# EAGLE board PCB panel M1 (EAGLE 6.1), part 1 of 5
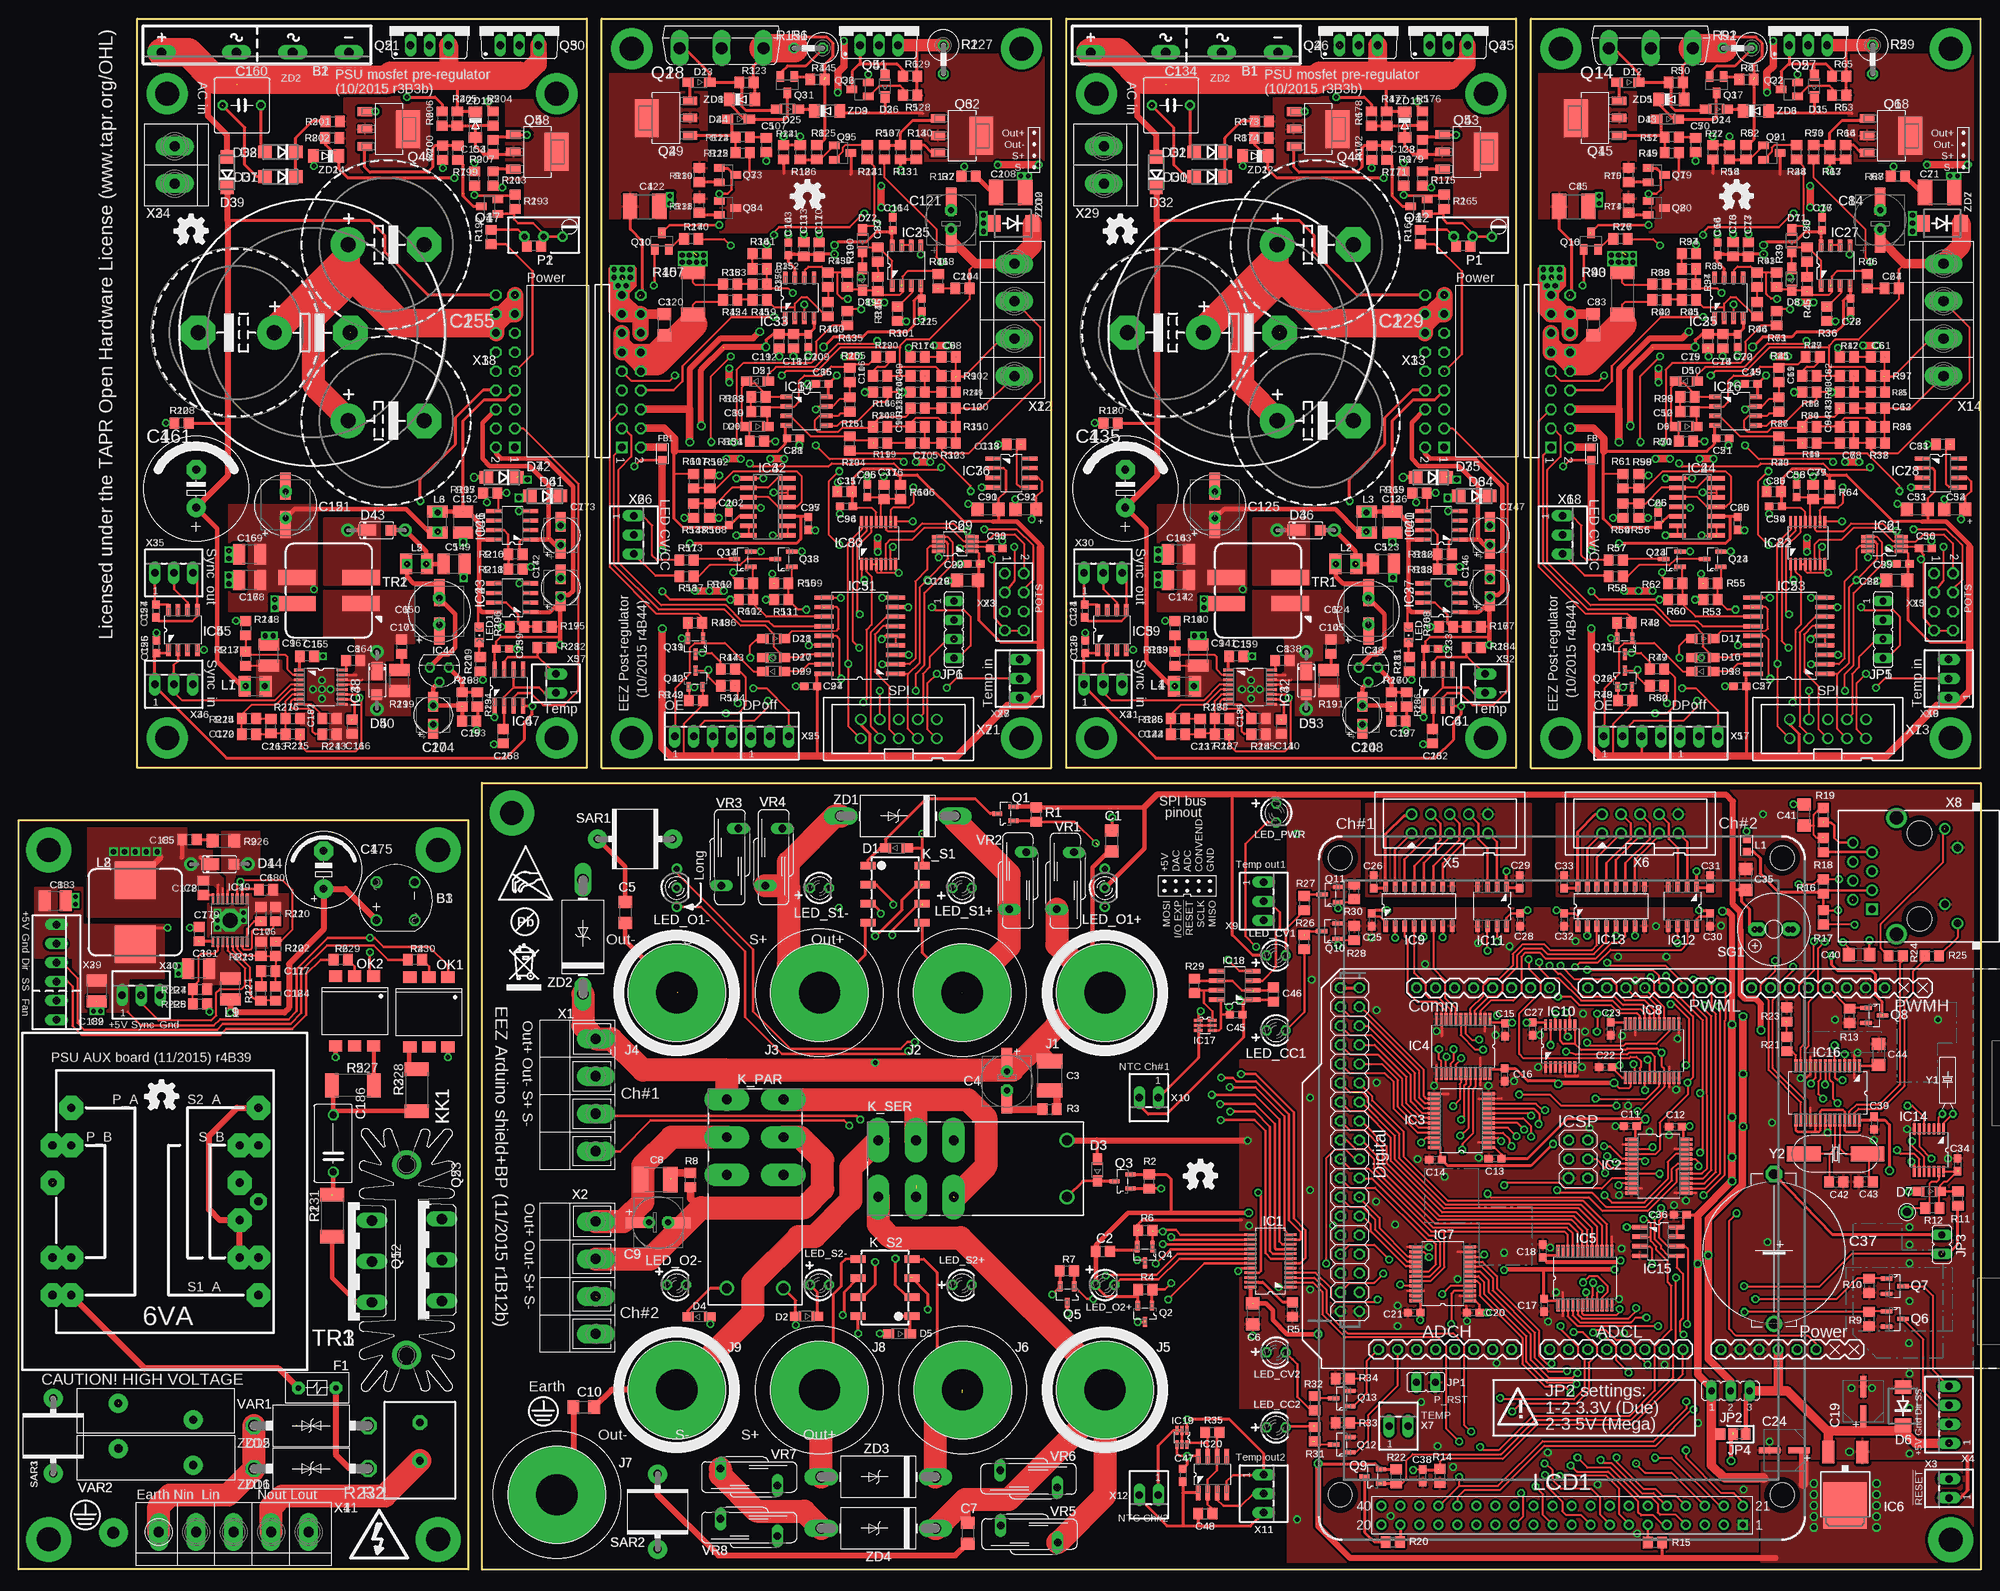
[diagram p0: board, top side]
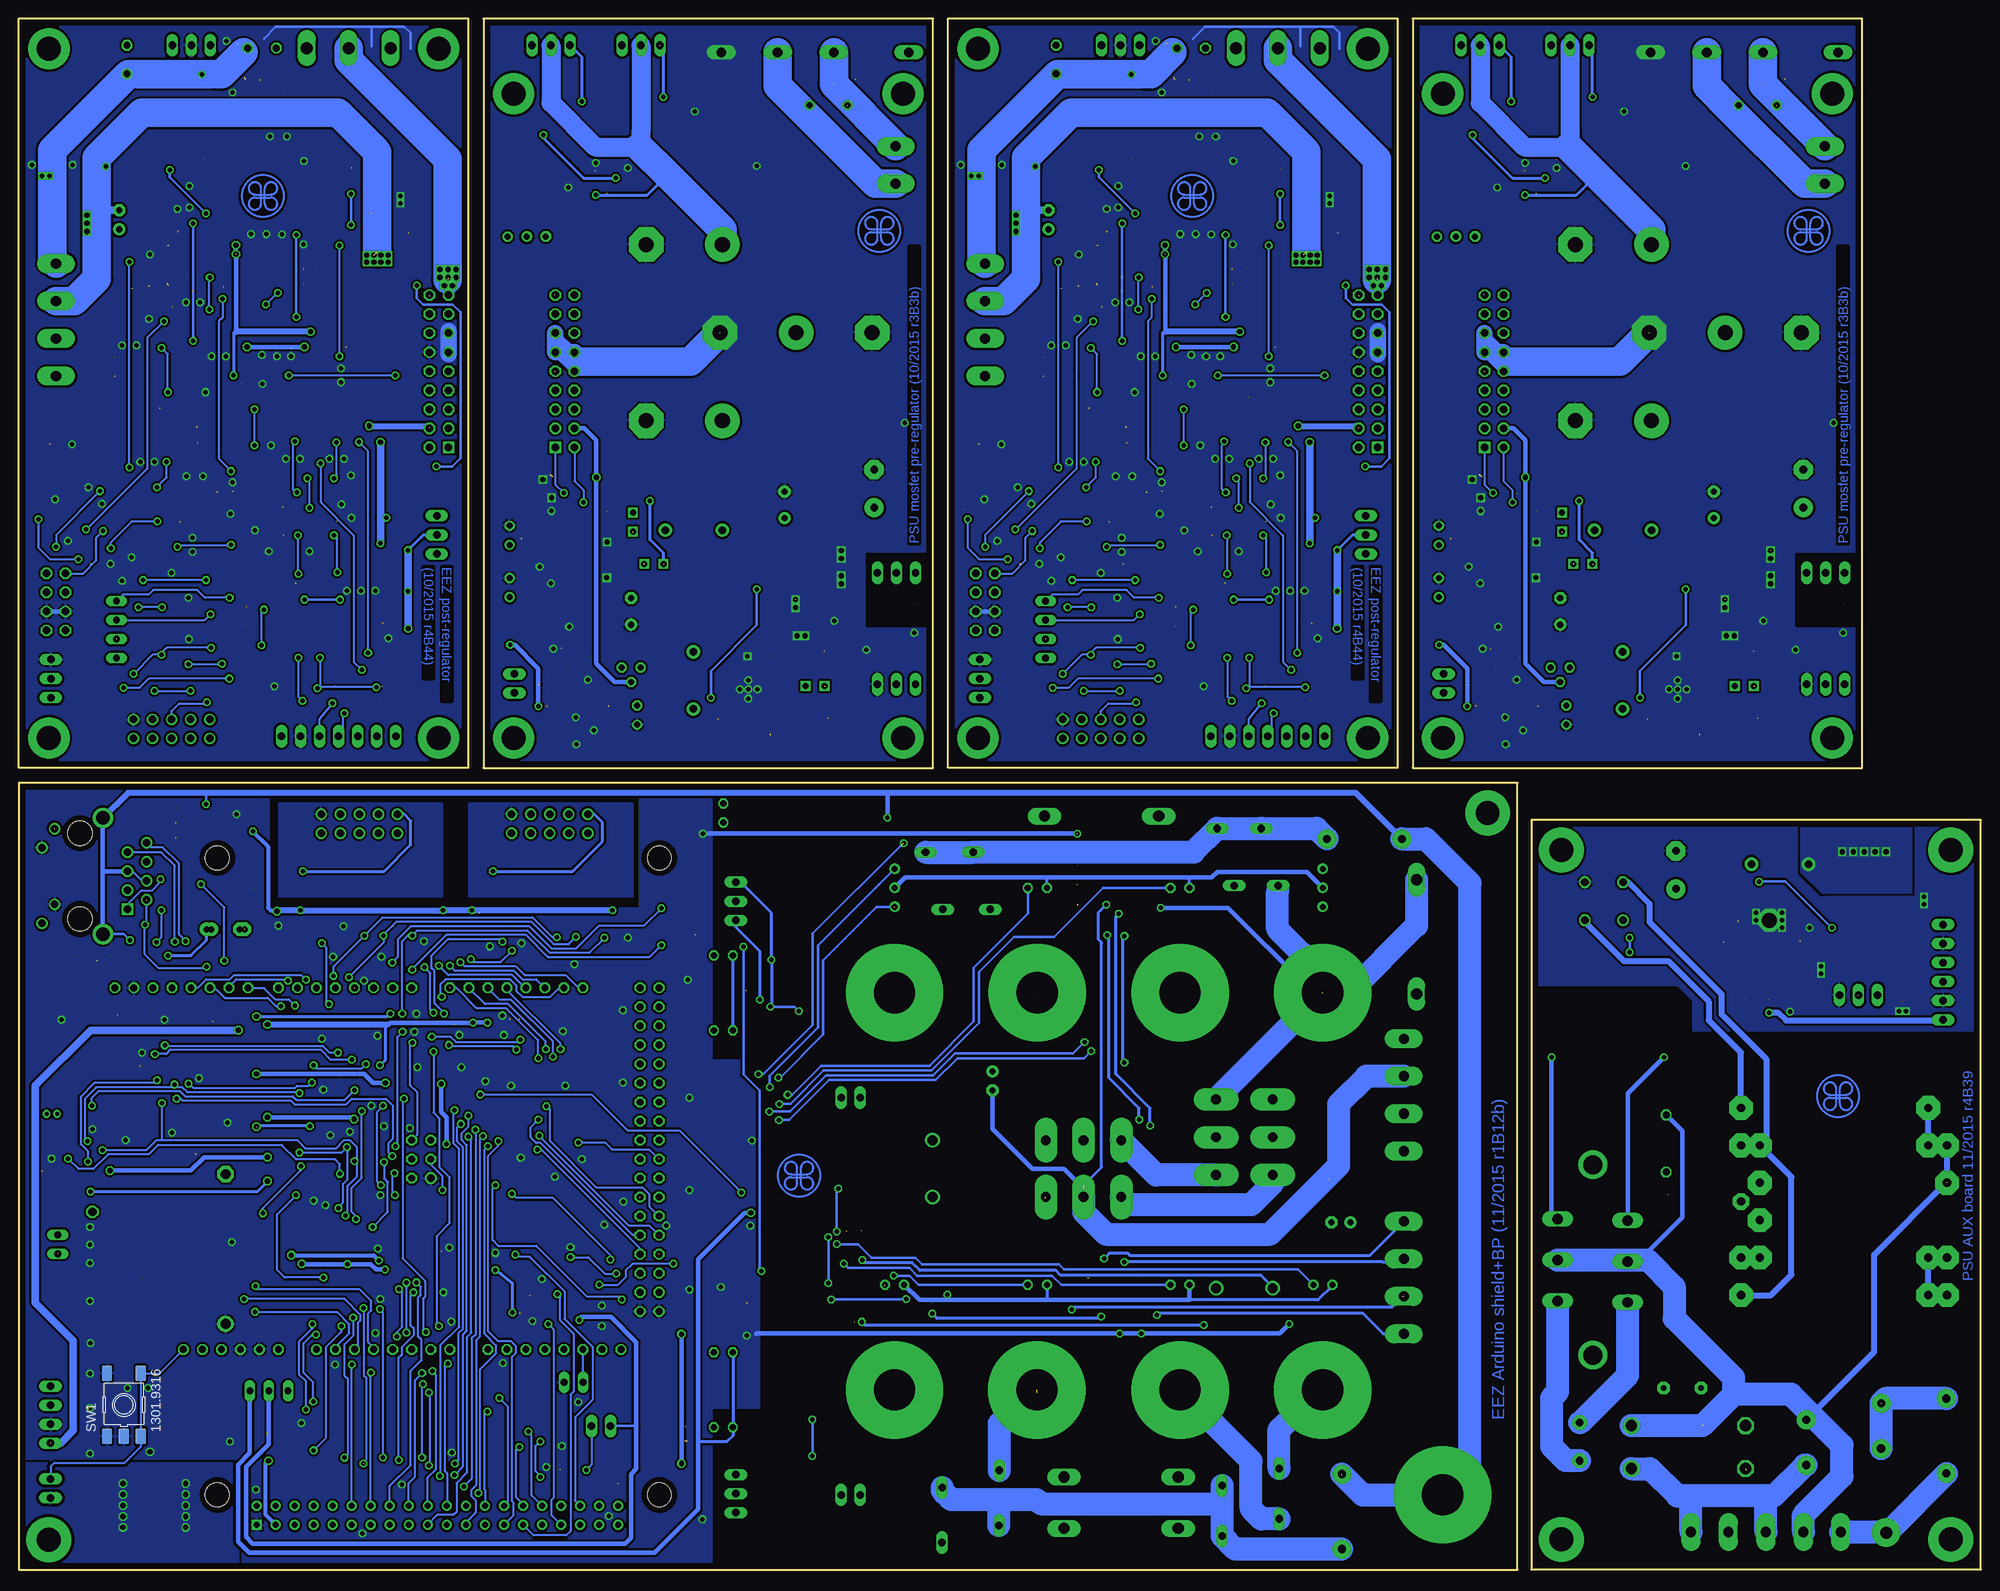
[diagram p1: board, bottom side, seen from below]

Size 261.84 x 207 mm. Coordinates in mm from the lower left corner, seen from the top.
Outline: 61.81,0 61.81,105 261.81,105 261.81,0 61.81,0
Outline: 261.81,107 261.81,207 201.81,207 201.81,107 261.81,107
Outline: 137.81,107 137.81,207 77.81,207 77.81,107 137.81,107
Outline: 139.81,207 199.81,207 199.81,107 139.81,107 139.81,207
Outline: 15.81,207 75.81,207 75.81,107 15.81,107 15.81,207
Outline: 0,0.03 0,100.03 60,100.03 60,0.03 0,0.03
Copper layers (1+5*16): Top 0.035mm / dielectric 0.75mm / Route5 0.035mm / dielectric 0.75mm / Bottom 0.035mm
Design rules: minimum track width 10mil, minimum drill 0.5mm, track to track 8mil, track to pad 8mil, pad to pad 8mil, via to via 8mil, smd to smd 8mil, copper to edge 30mil, drill to drill 8mil, minimum pad ring 10mil, minimum via ring 8mil, stop-mask expansion 0mil, vias tented up to drill 25mil, thermal gap 10mil
Net classes: 0 default: width 0.254 mm, drill 0.61 mm, clearance 0.254 mm; 1 power: width 0.254 mm, drill 0.406 mm, clearance 0.203 mm; 2 gnd: width 0.254 mm, drill 0.406 mm, clearance 0.203 mm; 3 isolators: width 0.254 mm, drill 0.61 mm, clearance 0.254 mm
tKeepout: 8 lines

## Footprints (pad centres in the part's own frame; a part is rotated, then mirrored left to right if it is on the bottom)
GBI20 = drill 1.3 long: + -12.75,-3.5; - 12.25,-3.5; AC1 -2.75,-3.5; AC2 4.75,-3.5
RB1A = drill 1.016: + -2.54,2.54 | drill 1.016 octagon: - 2.54,-2.54; AC1 2.54,2.54; AC2 -2.54,-2.54
C1206 = smd 1.6 x 1.8: 1 -1.4,0; 2 1.4,0
C0805 = smd 1.3 x 1.5: 1 -0.95,0; 2 0.95,0
C1812 = smd 1.9 x 3.4: 1 -1.95,0; 2 1.95,0
CAPAE660X610N_COMBO2 = smd 3.6 x 1.4: 1 -2.6,0; 2 2.5,0 | drill 0.813 pad 1.6: 1.1 -1.27,0 | drill 0.813 pad 1.6 octagon: 2.1 1.27,0
C0603 = smd 1.1 x 1: 1 -0.85,0; 2 0.85,0
PANASONIC_C = smd 2.87 x 0.762: 1 -1.981,0; 2 1.981,0
SG-R20MM = drill 1.3 pad 2.184 octagon: 1 10.389,0 | drill 1.3 pad 2.184: 2 -9.601,0
C1210 = smd 1.6 x 2.7: 1 -1.4,0; 2 1.4,0
CAPAE660X610N_COMBO = smd 3.6 x 1.4: 1 -2.6,0; 2 2.5,0 | drill 0.813 pad 1.6: 1.1 -1.778,0 | drill 0.813 pad 1.6 octagon: 2.1 1.778,0
ED35D+3XED22.5_COMBO = drill 2.007 pad 4.597: + -5.08,0; +2 4.763,11.748; +3 4.763,-11.748 | drill 2.007 pad 4.597 octagon: - 5.08,0; -1 -15.24,0; -2 14.922,11.748; -3 14.922,-11.748
C050-075X075 = drill 0.813 octagon: 1 -2.54,0; 2 2.54,0
ECAP5/13 = drill 1.016 pad 2.54: + -2.54,0 | drill 1.016 pad 2.54 octagon: - 2.54,0
CAPAE430X610N_COMBO = smd 2.6 x 1.3: 1 -1.8,0; 2 1.8,0 | drill 0.8: 1.1 -1.27,0 | drill 0.8 octagon: 2.1 1.27,0
ECAP5/10.5 = drill 1.016 pad 2.54: + -2.54,0 | drill 1.016 pad 2.54 octagon: - 2.54,0
C075-052X106 = drill 0.914 octagon: 1 -3.81,0; 2 3.81,0
SOD323-W = smd 1.5 x 1.2: A 1.45,0; C -1.45,0
DO214AA = smd 1.8 x 2.2: A 2.55,0; C -2.55,0
DO214AC = smd 1.8 x 1.7: A 2.05,0; C -2.05,0
DO34+SOD123 = drill 1 pad 1.778: A 3.81,0; C -3.81,0 | smd 1.4 x 1.4: A.1 1.9,0 | smd 2.4 x 1.5: C.1 -1.27,0
POLYSWITCH-R7 = drill 0.7 pad 1.676 octagon: P$1 -2.5,0; P$2 2.5,0
BEAD0603 = smd 1 x 1.1: P$1 -0.85,0; P$2 0.85,0
SOP63P600X175-24N = smd 1.6 x 0.356: 1 -2.667,3.505; 2 -2.667,2.845; 3 -2.667,2.235; 4 -2.667,1.575; 5 -2.667,0.965; 6 -2.667,0.305; 7 -2.667,-0.305; 8 -2.667,-0.965; 9 -2.667,-1.575; 10 -2.667,-2.235; 11 -2.667,-2.845; 12 -2.667,-3.505; 13 2.667,-3.505; 14 2.667,-2.845; 15 2.667,-2.235; 16 2.667,-1.575; 17 2.667,-0.965; 18 2.667,-0.305; 19 2.667,0.305; 20 2.667,0.965; 21 2.667,1.575; 22 2.667,2.235; 23 2.667,2.845; 24 2.667,3.505
SOP65P780X200-24N = smd 1.651 x 0.432: 1 -3.632,3.581; 2 -3.632,2.921; 3 -3.632,2.286; 4 -3.632,1.626; 5 -3.632,0.965; 6 -3.632,0.33; 7 -3.632,-0.33; 8 -3.632,-0.965; 9 -3.632,-1.626; 10 -3.632,-2.286; 11 -3.632,-2.921; 12 -3.632,-3.581; 13 3.632,-3.581; 14 3.632,-2.921; 15 3.632,-2.286; 16 3.632,-1.626; 17 3.632,-0.965; 18 3.632,-0.33; 19 3.632,0.33; 20 3.632,0.965; 21 3.632,1.626; 22 3.632,2.286; 23 3.632,2.921; 24 3.632,3.581
DPACK = smd 1.6 x 3: 1 -2.28,-4.8; 3 2.28,-4.8 | smd 5.8 x 6.2: 4 0,2.38
SOIC-16 = smd 1.549 x 0.61: 1 -2.692,4.445; 2 -2.692,3.175; 3 -2.692,1.905; 4 -2.692,0.635; 5 -2.692,-0.635; 6 -2.692,-1.905; 7 -2.692,-3.175; 8 -2.692,-4.445; 9 2.692,-4.445; 10 2.692,-3.175; 11 2.692,-1.905; 12 2.692,-0.635; 13 2.692,0.635; 14 2.692,1.905; 15 2.692,3.175; 16 2.692,4.445
SOP65P640X120-14N = smd 1.473 x 0.356: 1 -2.819,1.956; 2 -2.819,1.295; 3 -2.819,0.66; 4 -2.819,0; 5 -2.819,-0.66; 6 -2.819,-1.295; 7 -2.819,-1.956; 8 2.819,-1.956; 9 2.819,-1.295; 10 2.819,-0.66; 11 2.819,0; 12 2.819,0.66; 13 2.819,1.295; 14 2.819,1.956
SOIC127P600X173-8N = smd 1.55 x 0.6: 1 -2.7,1.9; 2 -2.7,0.63; 3 -2.7,-0.64; 4 -2.7,-1.91; 5 2.7,-1.91; 6 2.7,-0.64; 7 2.7,0.63; 8 2.7,1.9
SOIC127P600X175-8N = smd 1.981 x 0.559: 1 -2.464,1.905; 2 -2.464,0.635; 3 -2.464,-0.635; 4 -2.464,-1.905; 5 2.464,-1.905; 6 2.464,-0.635; 7 2.464,0.635; 8 2.464,1.905
SOP65P780X200-28N = smd 1.651 x 0.432: 1 -3.632,4.216; 2 -3.632,3.581; 3 -3.632,2.921; 4 -3.632,2.286; 5 -3.632,1.626; 6 -3.632,0.965; 7 -3.632,0.33; 8 -3.632,-0.33; 9 -3.632,-0.965; 10 -3.632,-1.626; 11 -3.632,-2.286; 12 -3.632,-2.921; 13 -3.632,-3.581; 14 -3.632,-4.216; 15 3.632,-4.216; 16 3.632,-3.581; 17 3.632,-2.921; 18 3.632,-2.286; 19 3.632,-1.626; 20 3.632,-0.965; 21 3.632,-0.33; 22 3.632,0.33; 23 3.632,0.965; 24 3.632,1.626; 25 3.632,2.286; 26 3.632,2.921; 27 3.632,3.581; 28 3.632,4.216
SOT65P210X110-6N = smd 1.168 x 0.356: 1 -0.94,0.66; 2 -0.94,0; 3 -0.94,-0.66; 4 0.94,-0.66; 5 0.94,0; 6 0.94,0.66
DGK8-M = smd 1.727 x 0.483: 1 -2.235,0.965; 2 -2.235,0.33; 3 -2.235,-0.33; 4 -2.235,-0.965; 5 2.235,-0.965; 6 2.235,-0.33; 7 2.235,0.33; 8 2.235,0.965
PW(R-PDSO-G16) = smd 1.6 x 0.35: 1 -2.8,2.3; 2 -2.8,1.65; 3 -2.8,1; 4 -2.8,0.35; 5 -2.8,-0.3; 6 -2.8,-0.95; 7 -2.8,-1.6; 8 -2.8,-2.25; 9 2.8,-2.25; 10 2.8,-1.6; 11 2.8,-0.95; 12 2.8,-0.3; 13 2.8,0.35; 14 2.8,1; 15 2.8,1.65; 16 2.8,2.3
SOIC127P1030X265-18N = smd 2.54 x 0.559: 1 -4.775,5.08; 2 -4.775,3.81; 3 -4.775,2.54; 4 -4.775,1.27; 5 -4.775,0; 6 -4.775,-1.27; 7 -4.775,-2.54; 8 -4.775,-3.81; 9 -4.775,-5.08; 10 4.775,-5.08; 11 4.775,-3.81; 12 4.775,-2.54; 13 4.775,-1.27; 14 4.775,0; 15 4.775,1.27; 16 4.775,2.54; 17 4.775,3.81; 18 4.775,5.08
SO14 = smd 0.6 x 2.2: 1 -3.81,-2.6; 2 -2.54,-2.6; 3 -1.27,-2.6; 4 0,-2.6; 5 1.27,-2.6; 6 2.54,-2.6; 7 3.81,-2.6; 8 3.81,2.6; 9 2.54,2.6; 10 1.27,2.6; 11 0,2.6; 12 -1.27,2.6; 13 -2.54,2.6; 14 -3.81,2.6
TO92 = drill 0.813 octagon: 1 -1.27,0; 2 0,1.905; 3 1.27,0
SOP65P640X110-16N = smd 1.422 x 0.356: 1 -2.845,2.286; 2 -2.845,1.626; 3 -2.845,0.965; 4 -2.845,0.33; 5 -2.845,-0.33; 6 -2.845,-0.965; 7 -2.845,-1.626; 8 -2.845,-2.286; 9 2.845,-2.286; 10 2.845,-1.626; 11 2.845,-0.965; 12 2.845,-0.33; 13 2.845,0.33; 14 2.845,0.965; 15 2.845,1.626; 16 2.845,2.286
SOP65P640X110-17N_HOLE = smd 1.422 x 0.356: 1 -2.845,2.286; 2 -2.845,1.626; 3 -2.845,0.965; 4 -2.845,0.33; 5 -2.845,-0.33; 6 -2.845,-0.965; 7 -2.845,-1.626; 8 -2.845,-2.286; 9 2.845,-2.286; 10 2.845,-1.626; 11 2.845,-0.965; 12 2.845,-0.33; 13 2.845,0.33; 14 2.845,0.965; 15 2.845,1.626; 16 2.845,2.286 | smd 2.032 x 2.032: TP 0,0 | drill 2 octagon: TP2 0,0
BP_5_12/15WHITE = drill 5.5 pad 13: P$1 0,0
BP_5_12/15BLK = drill 5.5 pad 13: P$1 0,0
JP1 = drill 0.914 long: 1 0,-1.27; 2 0,1.27
JUMPER_3-PIN = drill 0.914 long: 1 -2.54,0; 2 0,0; 3 2.54,0
A0R-JMP = smd 1.5 x 1.3: 1 0,1.7; 2 0,0; 3 0,-1.7
JP4 = drill 0.914 long: 1 -3.81,0; 2 -1.27,0; 3 1.27,0; 4 3.81,0
RT-C/016A5 = drill 1.3 pad 3 long: 11A 8.83,3.78; 11B 8.83,-3.78; 12A 3.79,3.78; 12B 3.79,-3.78; 14A 13.87,3.78; 14B 13.87,-3.78 | drill 1.3: A1 -11.33,-3.78; A2 -11.33,3.78
G6K-2F = smd 1 x 2: 1 -3.81,-3.6; 2 -1.27,-3.6; 3 1.27,-3.6; 4 3.81,-3.6; 5 3.81,3.6; 6 1.27,3.6; 7 -1.27,3.6; 8 -3.81,3.6
SK409 = drill 2.54 pad 3.81: K1 -12.7,-1.512; K2 12.7,-1.512
L1210_COMBO = smd 1.6 x 2.7: 1 -1.4,0; 2 1.4,0 | drill 0.8 square: 1.1 -1.27,0; 2.1 1.27,0
MSS1278 = smd 5.5 x 5: 1 0,4.25; 2 0,-4.25
L1210 = smd 1.6 x 2.7: 1 -1.4,0; 2 1.4,0
LCD_TFT_320QVT_MIRROR = drill 0.8 square: 1 48.26,0 | drill 0.8: 2 45.72,0; 3 43.18,0; 4 40.64,0; 5 38.1,0; 6 35.56,0; 7 33.02,0; 8 30.48,0; 9 27.94,0; 10 25.4,0; 11 22.86,0; 12 20.32,0; 13 17.78,0; 14 15.24,0; 15 12.7,0; 16 10.16,0; 17 7.62,0; 18 5.08,0; 19 2.54,0; 20 0,0; 21 48.26,2.54; 22 45.72,2.54; 23 43.18,2.54; 24 40.64,2.54; 25 38.1,2.54; 26 35.56,2.54; 27 33.02,2.54; 28 30.48,2.54; 29 27.94,2.54; 30 25.4,2.54; 31 22.86,2.54; 32 20.32,2.54; 33 17.78,2.54; 34 15.24,2.54; 35 12.7,2.54; 36 10.16,2.54; 37 7.62,2.54; 38 5.08,2.54; 39 2.54,2.54; 40 0,2.54 | hole 3.2: -5.5,4; 53.5,4; -5.5,89; 53.5,89
CHIPLED_0805 = smd 1.2 x 1.2: A 0,-1.05; C 0,1.05
LED3MM = drill 0.813 octagon: A -1.27,0; K 1.27,0
DUO_LED3MM = drill 0.8 pad 1.4: A 2.54,0; AG -2.54,0; C 0,0
ARDUINO+ICSP_MIRROR = drill 0.9 octagon: 0 63.5,2.54; 1 60.96,2.54; 2 58.42,2.54; 3 55.88,2.54; 3.3V 35.56,50.8; 4 53.34,2.54; 5 50.8,2.54; 5V 38.1,50.8; 5V(1) 93.98,2.54; 5V(2) 96.52,2.54; 6 48.26,2.54; 7 45.72,2.54; 8 41.656,2.54; 9 39.116,2.54; 10 36.576,2.54; 11 34.036,2.54; 12 31.496,2.54; 13 28.956,2.54; 14 68.58,2.54; 15 71.12,2.54; 16 73.66,2.54; 17 76.2,2.54; 18 78.74,2.54; 19 81.28,2.54; 20 83.82,2.54; 21 86.36,2.54; 22 93.98,5.08; 23 96.52,5.08; 24 93.98,7.62; 25 96.52,7.62; 26 93.98,10.16; 27 96.52,10.16; 28 93.98,12.7; 29 96.52,12.7; 30 93.98,15.24; 31 96.52,15.24; 32 93.98,17.78; 33 96.52,17.78; 34 93.98,20.32; 35 96.52,20.32; 36 93.98,22.86; 37 96.52,22.86; 38 93.98,25.4; 39 96.52,25.4; 40 93.98,27.94; 41 96.52,27.94; 42 93.98,30.48; 43 96.52,30.48; 44 93.98,33.02; 45 96.52,33.02; 46 93.98,35.56; 47 96.52,35.56; 48 93.98,38.1; 49 96.52,38.1; 50 93.98,40.64; 51 96.52,40.64; 52 93.98,43.18; 53 96.52,43.18; A0 50.8,50.8; A1 53.34,50.8; A2 55.88,50.8; A3 58.42,50.8; A4 60.96,50.8; A5 63.5,50.8; A6 66.04,50.8; A7 68.58,50.8; A8 73.66,50.8; A9 76.2,50.8; A10 78.74,50.8; A11 81.28,50.8; A12 83.82,50.8; A13 86.36,50.8; A14 88.9,50.8; A15 91.44,50.8; AREF 23.876,2.54; GND 26.416,2.54; GND1 40.64,50.8; GND2 43.18,50.8; GND3 93.98,45.72; GND4 96.52,45.72; ICSP_+5V 66.04,22.86; ICSP_MISO 63.5,22.86; ICSP_MOSI 66.04,25.4; ICSP_RESET 63.5,27.94; ICSP_SCK 63.5,25.4; RESET 33.02,50.8; VIN 45.72,50.8 | drill 1.016 octagon: ICSP_GND 66.04,27.94
DIL6-SMD = smd 1.78 x 1.52: 1 -2.54,-4.645; 2 0,-4.645; 3 2.54,-4.645; 4 2.54,4.645; 5 0,4.645; 6 -2.54,4.645
R_TRIM+R0805 = smd 1.3 x 1.5: 1 0.32,1.27; 2 2.22,1.27 | drill 0.813 octagon: A -2.54,0 | drill 0.8 pad 1.422 octagon: E 2.54,0 | drill 0.8 pad 1.422: S 0,0
SOT95P237X112-3N = smd 1.321 x 0.559: 1 -1.092,0.94; 2 -1.092,-0.94; 3 1.092,0
SOT103P240X110-3N = smd 1.524 x 0.559: 1 -1.079,1.016; 2 -1.079,-1.016; 3 1.079,0
TO247BV = drill 1.6 long: D 0,-2.921; G -5.588,-2.921; S 5.588,-2.921
SOT230P700X180-4N = smd 1.905 x 1.143: 1 -3.2,2.311; 2 -3.2,0; 3 -3.2,-2.311 | smd 3.175 x 5.08: 4 2.565,0
SOT23-BEC = smd 1 x 1.4: B -0.95,-1.1; C 0,1.1; E 0.95,-1.1
TO220B-VMOS = drill 1.016 long: D 0,-2.54; G -2.54,-2.54; S 2.54,-2.54
TOP3S-1 = drill 1.397 long: A1 -5.461,-3.175; A2 0,-3.175; G 5.461,-3.175
R0805 = smd 1.3 x 1.5: 1 -0.95,0; 2 0.95,0
0411V = drill 0.914 octagon: 1 -2.54,0; 2 1.27,0
R2512 = smd 1.8 x 3.2: 1 -2.8,0; 2 2.8,0
R1210 = smd 1.6 x 2.7: 1 -1.4,0; 2 1.4,0
R1206 = smd 1.6 x 1.803: 1 -1.422,0; 2 1.422,0
R_0913 = drill 1.016 pad 1.93 octagon: 1 -3.556,0; 2 1.524,0
SAR = drill 1.1 pad 2.54: P$1 0,0; P$2 10,0
BUZZER = drill 0.8 pad 1.778 octagon: + 1.905,0; +B 2.54,0 | drill 0.8 pad 1.778: - -1.905,0; -B -2.54,0
SHORT = drill 0.6 octagon: 1 0,0; 2 0,0
SHORT_2 = drill 1.1 octagon: 1 0,0 | drill 1.1 pad 1.778 octagon: 2 0,0
TACTM-6XN = smd 2.1 x 1.4: 1 -4.2,2.25; 2 4.2,2.25; 3 -4.2,-2.25; 4 4.2,-2.25; 5 -4.2,0
PCB_SHIELD_TAB = drill 1.1 octagon: 1 0,0
MSD1260 = smd 2 x 5: 1 1.75,4.25; 2 -1.75,4.25; 3 -1.75,-4.25; 4 1.75,-4.25
PCB_TRAFO6VA_DUAL = drill 1.1 pad 3.175 octagon: NC1 -15,2.5; NC2 -15,-12.5; NC4 10,2.5; P1 -12.5,12.5; P1.1 -12.5,7.5; P1.2 -15,7.5; P2 -12.5,-12.5; P2.1 -12.5,-7.5; P2.2 -15,-7.5; S1.1 12.5,-12.5; S1.2 12.5,-7.5; S1.2A 10,-2.5; S1.2NC 10,-7.5; S2.1 12.5,7.5; S2.1A 10,7.5; S2.2 12.5,12.5 | drill 1.1 pad 2.184 octagon: NC3 12.5,0
VARISTOR = drill 1.1 pad 2.54: P$1 0,0; P$2 10,-2.2
S10K175 = drill 1.016 long: 1 -1.143,-3.81; 2 1.143,3.81
TBLOCK5.0_4S = drill 1.35 pad 2.54 long: P$1 0,0; P$2 0,-5; P$3 0,-10; P$4 0,-15
22-23-2021 = drill 1 long: 1 -1.27,0; 2 1.27,0
22-23-2041 = drill 1 long: 1 -3.81,0; 2 -1.27,0; 3 1.27,0; 4 3.81,0
IDC-10PIN = drill 1 pad 1.422: 1 -5.08,-1.27; 2 -5.08,1.27; 3 -2.54,-1.27; 4 -2.54,1.27; 5 0,-1.27; 6 0,1.27; 7 2.54,-1.27; 8 2.54,1.27; 9 5.08,-1.27; 10 5.08,1.27
RJ45-TRAFO-LED = drill 1 square: 1 -4.445,6.35 | drill 1: 2 -3.175,8.89; 3 -1.905,6.35; 4 -0.635,8.89; 5 0.635,6.35; 6 1.905,8.89; 7 3.175,6.35; 8 4.445,8.89; 9 -6.325,-5.08; 10 -3.785,-3.38; 11 3.785,-5.08; 12 6.325,-3.38 | drill 1.8: SH1 -7.75,3.05; SH2 7.75,3.05 | hole 3.251: -5.715,0; 5.715,0
22-23-2031 = drill 1 long: 1 -2.54,0; 2 0,0; 3 2.54,0
PAK100/2500-10 = drill 1 pad 1.422: 1 -5.08,-1.27; 2 -5.08,1.27; 3 -2.54,-1.27; 4 -2.54,1.27; 5 0,-1.27; 6 0,1.27; 7 2.54,-1.27; 8 2.54,1.27; 9 5.08,-1.27; 10 5.08,1.27
TBLOCK5.0_4 = drill 1.35 pad 2.54 long: P$1 0,0; P$2 0,-5; P$3 0,-10; P$4 0,-15
TSW-104-02-S-D = drill 1 pad 1.5 octagon: 1 -3.81,-1.27; 2 -3.81,1.27; 3 -1.27,-1.27; 4 -1.27,1.27; 5 1.27,-1.27; 6 1.27,1.27; 7 3.81,-1.27; 8 3.81,1.27
TSW-109-08-L-D-RA = drill 1 pad 1.5 square: 1 10.16,1.524 | drill 1 pad 1.5 octagon: 2 10.16,4.064; 3 7.62,1.524; 4 7.62,4.064; 5 5.08,1.524; 6 5.08,4.064; 7 2.54,1.524; 8 2.54,4.064; 9 0,1.524; 10 0,4.064; 11 -2.54,1.524; 12 -2.54,4.064; 13 -5.08,1.524; 14 -5.08,4.064; 15 -7.62,1.524; 16 -7.62,4.064; 17 -10.16,1.524; 18 -10.16,4.064
TBLOCK5.0_2 = drill 1.35 pad 2.54 long: 1 0,0; 2 0,-5
SSW-109-02-T-D-RA = drill 1 pad 1.5 square: 1 20.32,2.54 | drill 1 pad 1.5 octagon: 2 20.32,0; 3 17.78,2.54; 4 17.78,0; 5 15.24,2.54; 6 15.24,0; 7 12.7,2.54; 8 12.7,0; 9 10.16,2.54; 10 10.16,0; 11 7.62,2.54; 12 7.62,0; 13 5.08,2.54; 14 5.08,0; 15 2.54,2.54; 16 2.54,0; 17 0,2.54; 18 0,0
22-23-2061 = drill 1 long: 1 -6.35,0; 2 -3.81,0; 3 -1.27,0; 4 1.27,0; 5 3.81,0; 6 6.35,0
TBLOCK5.0_5 = drill 1.35 pad 2.54 long: 1 0,0; 2 0,-5; 3 0,-10; 4 0,-15; 5 0,-20
R26_XTAL = drill 0.5: 1 -0.7,0; 2 0.7,0
HC-49/4H = smd 4.5 x 2: 1 -4.25,0; 2 4.25,0
DO201 = drill 1.499 long: A 7.62,0; C -7.62,0
MINIMELF = smd 1.4 x 1.8: A 1.7,0; C -1.7,0
DO201-BIDIR = drill 1.499 octagon: A 7.62,0; C -7.62,0

## Placement (x,y rotation side)
B1  GBI20D  [GBI20]  155.81,206 0 top
B2  GBI20D  [GBI20]  31.81,206 0 top
B3  B40R-DIO  [RB1A]  50.3,89.22 90 top
C1  10n  [C1206]  145.89,97.28 90 top
C2  1u  [C0805]  144.7,42.48 0 top
C3  470n/100V  [C1812]  137.58,65.91 270 top
C4  22u/63V  [CAPAE660X610N_COMBO2]  131.87,65.21 270 top
C5  10n  [C1206]  80.94,87.69 270 top
C6  10u  [C1206]  164.7,34.16 270 top
C7  10n  [C1206]  126.66,4.89 270 top
C8  470n/100V  [C1812]  85.01,52.07 0 top
C9  22u/63V  [CAPAE660X610N_COMBO2]  85.39,46.35 0 top
C10  10n  [C1206]  75.42,21.72 0 top
C11  100n  [C0603]  215.05,59.18 180 top
C12  100n  [C0603]  221.09,59.12 0 top
C13  100n  [C0603]  197.02,54.86 180 top
C14  100n  [C0603]  189.08,54.74 0 top
C15  100n  [C0603]  198.35,72.06 270 top
C16  100n  [C0603]  198.29,66.05 90 top
C17  100n  [C0603]  203.56,35.31 270 top
C18  100n  [C0603]  203.37,42.55 270 top
C19  47u  [PANASONIC_C]  246.17,22.48 90 top
C20  100n  [C0603]  194.1,34.29 180 top
C21  100n  [C0603]  186.22,34.29 0 top
C22  100n  [C0603]  211.75,67.06 180 top
C23  100n  [C0603]  212.45,72.2 90 top
C24  10u  [PANASONIC_C]  235.63,15.94 180 top
C25  100n  [C0603]  180.57,86.74 270 top
C26  100n  [C0603]  180.83,91.82 90 top
C27  100n  [C0603]  202.04,72.2 90 top
C28  100n  [C0603]  200.38,86.74 270 top
C29  100n  [C0603]  200.32,91.82 90 top
C30  100n  [C0603]  225.72,86.74 270 top
C31  100n  [C0603]  225.72,91.82 90 top
C32  100n  [C0603]  206.23,86.74 270 top
C33  100n  [C0603]  206.23,91.82 90 top
C34  100n  [C0603]  258.74,54.04 270 top
C35  10u  [C1206]  230.42,92.14 270 top
C36  100n  [C0603]  221.72,47.37 180 top
C37  EECS5R5H105  [SG-R20MM]  234.23,42.42 90 top
C38  100n  [C0603]  187.37,12.51 90 top
C39  100n  [C0603]  247.63,59.63 270 top
C40  10n  [C1206]  245.6,82.11 0 top
C41  10n  [C1206]  238.23,100.71 90 top
C42  18p  [C0805]  242.55,51.75 0 top
C43  18p  [C0805]  246.49,51.75 180 top
C44  10u  [C1206]  248.2,68.77 270 top
C45  100n  [C0603]  162.48,74.1 0 top
C46  47n  [C0805]  167.43,76.77 90 top
C47  100n  [C0603]  155.36,12.64 270 top
C48  47n  [C0805]  158.35,7.49 0 top
C49  100n  [C0603]  231.21,158.24 0 top
C50  1n  [C0805]  238.64,175.52 90 top
C51  100n  [C0603]  227.4,151.01 180 top
C52  120p  [C0805]  222.7,154.56 180 top
C53  10u  [C1206]  253.37,141.54 180 top
C54  10u (Tant.)  [C1206]  258.39,141.54 180 top
C55  100n  [C0603]  251.47,134.24 0 top
C56  100n  [C0603]  254.45,136.34 180 top
C57  100n  [C0603]  229.69,117.92 180 top
C58  100n  [C0603]  237.25,144.02 270 top
C59  100n  [C0603]  234.45,141.93 0 top
C60  100n  [C0603]  229.37,139.64 90 top
C61  47p  [C0805]  248.1,161.86 180 top
C62  2n2  [C0805]  243.98,159.33 180 top
C63  47p  [C0805]  248.1,155.02 180 top
C64  2n2  [C0805]  243.98,152.53 0 top
C65  100n  [C0603]  218.77,140.27 270 top
C66  100n  [C0603]  226.7,176.28 90 top
C67  1n  [C0805]  249.94,171.01 180 top
C68  1n5  [C0805]  243.98,150.37 180 top
C69  1n5  [C0805]  238.96,159.32 180 top
C70  10n  [C0805]  223.78,190.12 270 top
C71  470n  [C1812]  256.36,183.84 180 top
C72  100n  [C0603]  229.37,164.02 270 top
C73  1u  [C0805]  230.82,176.2 270 top
C74  10n  [C0805]  227.4,163.96 90 top
C75  1u  [C0805]  225.45,163.96 90 top
C76  10n  [C0805]  228.77,176.22 270 top
C77  100n  [C0603]  240.67,179.64 270 top
C78  100n  [C0603]  244.48,168.79 90 top
C79  1u  [C0805]  239.47,143.83 270 top
C80  1u  [C0805]  234.2,143.89 0 top
C81  1u  [C0805]  256.8,150.18 180 top
C82  10u  [C1206]  250.64,132.02 180 top
C83  1u/100V  [C1206]  210.13,166.18 270 top
C84  22u/63V  [CAPAE660X610N_COMBO2]  248.42,180.15 90 top
C85  470n  [C1812]  207.53,181.93 0 top
C86  100n  [C0603]  107.21,158.24 0 top
C87  1n  [C0805]  114.64,175.52 90 top
C88  100n  [C0603]  103.4,151.01 180 top
C89  120p  [C0805]  98.7,154.56 180 top
C90  10u  [C1206]  129.37,141.54 180 top
C91  10u (Tant.)  [C1206]  134.39,141.54 180 top
C92  100n  [C0603]  127.47,134.24 0 top
C93  100n  [C0603]  130.45,136.34 180 top
C94  100n  [C0603]  105.69,117.92 180 top
C95  100n  [C0603]  113.25,144.02 270 top
C96  100n  [C0603]  110.45,141.93 0 top
C97  100n  [C0603]  105.37,139.64 90 top
C98  47p  [C0805]  124.1,161.86 180 top
C99  2n2  [C0805]  119.98,159.33 180 top
C100  47p  [C0805]  124.1,155.02 180 top
C101  2n2  [C0805]  119.98,152.53 0 top
C102  100n  [C0603]  94.77,140.27 270 top
C103  100n  [C0603]  102.7,176.28 90 top
C104  1n  [C0805]  125.94,171.01 180 top
C105  1n5  [C0805]  119.98,150.37 180 top
C106  1n5  [C0805]  114.96,159.32 180 top
C107  10n  [C0805]  99.78,190.12 270 top
C108  470n  [C1812]  132.36,183.84 180 top
C109  100n  [C0603]  105.37,164.02 270 top
C110  1u  [C0805]  106.82,176.2 270 top
C111  10n  [C0805]  103.4,163.96 90 top
C112  1u  [C0805]  101.45,163.96 90 top
C113  10n  [C0805]  104.77,176.22 270 top
C114  100n  [C0603]  116.67,179.64 270 top
C115  100n  [C0603]  120.48,168.79 90 top
C116  1u  [C0805]  115.47,143.83 270 top
C117  1u  [C0805]  110.2,143.89 0 top
C118  1u  [C0805]  132.8,150.18 180 top
C119  10u  [C1206]  126.64,132.02 180 top
C120  1u/100V  [C1206]  86.13,166.18 270 top
C121  22u/63V  [CAPAE660X610N_COMBO2]  124.42,180.15 90 top
C122  470n  [C1812]  83.53,181.93 0 top
C123  2u2  [C1210]  182.1,134.24 0 top
C124  47u  [CAPAE660X610N_COMBO]  180.13,127.89 90 top
C125  47u  [CAPAE660X610N_COMBO]  159.62,142.12 90 top
C126  2u2  [C1210]  183.31,139.83 270 top
C127  100n  [C0805]  184.13,113.29 180 top
C128  560p  [C0805]  187.31,189.87 90 top
C129  10000u  [ED35D+3XED22.5_COMBO]  163.18,165.1 0 top
C130  100n  [C0603]  142.35,123.19 90 top
C131  100n  [C0603]  142.29,127.95 270 top
C132  22n  [C0805]  188.64,111.25 90 top
C133  100n  [C0603]  188.58,122.94 0 top
C134  1u  [C050-075X075]  153.78,195.46 0 top
C135  470u  [ECAP5/13]  147.68,144.29 90 top
C136  4n7  [C0805]  165.47,113.6 180 top
C137  6n8  [C0805]  157.66,112.59 90 top
C138  22n  [C0805]  168.64,121.35 180 top
C139  100n  [C0805]  162.48,121.92 180 top
C140  33n  [C0805]  168.51,112.52 270 top
C141  2u2/100V  [C1210]  157.4,122.05 90 top
C142  2u2  [C1210]  154.8,132.08 180 top
C143  2u2  [C1210]  154.8,135.51 180 top
C144  n.c.  [C0805]  154.73,111.51 180 top
C145  330p  [C0805]  175.12,123.19 270 top
C146  EEEFK1V100R  [CAPAE430X610N_COMBO]  196.33,131.07 90 top
C147  EEEFK1V100R  [CAPAE430X610N_COMBO]  196.33,138.05 90 top
C148  EEEFK1V220R  [CAPAE430X610N_COMBO]  179.31,114.05 90 top
C149  2u2  [C1210]  58.1,134.24 0 top
C150  47u  [CAPAE660X610N_COMBO]  56.13,127.89 90 top
C151  47u  [CAPAE660X610N_COMBO]  35.62,142.12 90 top
C152  2u2  [C1210]  59.31,139.83 270 top
C153  100n  [C0805]  60.13,113.29 180 top
C154  560p  [C0805]  63.31,189.87 90 top
C155  10000u  [ED35D+3XED22.5_COMBO]  39.18,165.1 0 top
C156  100n  [C0603]  18.35,123.19 90 top
C157  100n  [C0603]  18.29,127.95 270 top
C158  22n  [C0805]  64.64,111.25 90 top
C159  100n  [C0603]  64.58,122.94 0 top
C160  1u  [C050-075X075]  29.78,195.46 0 top
C161  470u  [ECAP5/13]  23.68,144.29 90 top
C162  4n7  [C0805]  41.47,113.6 180 top
C163  6n8  [C0805]  33.66,112.59 90 top
C164  22n  [C0805]  44.64,121.35 180 top
C165  100n  [C0805]  38.48,121.92 180 top
C166  33n  [C0805]  44.51,112.52 270 top
C167  2u2/100V  [C1210]  33.4,122.05 90 top
C168  2u2  [C1210]  30.8,132.08 180 top
C169  2u2  [C1210]  30.8,135.51 180 top
C170  n.c.  [C0805]  30.73,111.51 180 top
C171  330p  [C0805]  51.12,123.19 270 top
C172  EEEFK1V100R  [CAPAE430X610N_COMBO]  72.33,131.07 90 top
C173  EEEFK1V100R  [CAPAE430X610N_COMBO]  72.33,138.05 90 top
C174  EEEFK1V220R  [CAPAE430X610N_COMBO]  55.31,114.05 90 top
C175  1mF/25V  [ECAP5/10.5]  40.68,93.41 90 top
C176  820p  [C0805]  32.32,87.5 270 top
C177  3n9  [C0805]  33.31,79.88 180 top
C178  22n  [C0805]  24.64,91 270 top
C179  100n  [C0805]  24.07,84.84 270 top
C180  22n  [C0805]  33.02,90.74 0 top
C181  4u7  [C1210]  24.01,80.2 180 top
C182  4u7  [C1210]  10.42,77.22 270 top
C183  4u7  [C1210]  4.89,89.28 0 top
C184  180p  [C0805]  34.29,76.9 270 top
C185  330p  [C0805]  22.8,97.47 0 top
C186  47n/400V  [C075-052X106]  41.98,56.9 90 top
D1  BAS316  [SOD323-W]  117.13,96.3 0 top
D2  BAS316  [SOD323-W]  105.13,33.85 180 top
D3  BAS316  [SOD323-W]  143.93,53.34 90 top
D4  BAS316  [SOD323-W]  90.78,33.78 0 top
D5  BAS316  [SOD323-W]  117.52,31.5 180 top
D6  SMBJ5.0A-TR  [DO214AA]  251.44,21.84 90 top
D7  BAS316  [SOD323-W]  255,50.48 180 top
D8  BAS316  [SOD323-W]  236.61,172.21 90 top
D9  BAS316  [SOD323-W]  222.51,152.59 180 top
D10  BAS316  [SOD323-W]  222.58,158.63 0 top
D11  BAS316  [SOD323-W]  236.61,177.36 90 top
D12  BAS316  [SOD323-W]  214.77,198.5 180 top
D13  BAS316  [SOD323-W]  220.04,193.61 180 top
D14  BAS316  [SOD323-W]  226.58,194.95 180 top
D15  BAS316  [SOD323-W]  239.59,198 90 top
D16  BAS316  [SOD323-W]  224.74,121.73 0 top
D17  BAS316  [SOD323-W]  224.74,124.27 180 top
D18  BAS316  [SOD323-W]  224.74,119.89 0 top
D19  BAS316  [SOD323-W]  112.61,172.21 90 top
D20  BAS316  [SOD323-W]  98.51,152.59 180 top
D21  BAS316  [SOD323-W]  98.58,158.63 0 top
D22  BAS316  [SOD323-W]  112.61,177.36 90 top
D23  BAS316  [SOD323-W]  90.77,198.5 180 top
D24  BAS316  [SOD323-W]  96.04,193.61 180 top
D25  BAS316  [SOD323-W]  102.58,194.95 180 top
D26  BAS316  [SOD323-W]  115.59,198 90 top
D27  BAS316  [SOD323-W]  100.74,121.73 0 top
D28  BAS316  [SOD323-W]  100.74,124.27 180 top
D29  BAS316  [SOD323-W]  100.74,119.89 0 top
D30  S1G  [DO214AC]  158.93,185.93 180 top
D31  S1G  [DO214AC]  158.93,189.23 180 top
D32  S1G  [DO214AC]  151.81,186.5 90 top
D33  SR1100  [DO34+SOD123]  171.82,118.68 270 top
D34  SKL16  [DO214AC]  194.23,143.32 180 top
D35  SKL16  [DO214AC]  188.45,145.8 180 top
D36  SR1100  [DO34+SOD123]  171.75,138.75 0 top
D37  S1G  [DO214AC]  34.93,185.93 180 top
D38  S1G  [DO214AC]  34.93,189.23 180 top
D39  S1G  [DO214AC]  27.81,186.5 90 top
D40  SR1100  [DO34+SOD123]  47.82,118.68 270 top
D41  SKL16  [DO214AC]  70.23,143.32 180 top
D42  SKL16  [DO214AC]  64.45,145.8 180 top
D43  SR1100  [DO34+SOD123]  47.75,138.75 0 top
D44  SR1100  [DO34+SOD123]  26.8,94.17 0 top
EEZ_SIGNATURE  SIGNATURESMALL  [SIGNATURE_5MM]  157.71,52.59 180 top
EEZ_SIGNATURE1  SIGNATURESMALL  [SIGNATURE_5MM]  229.24,183.34 180 top
EEZ_SIGNATURE2  SIGNATURESMALL  [SIGNATURE_5MM]  105.24,183.34 180 top
EEZ_SIGNATURE3  SIGNATURESMALL  [SIGNATURE_5MM]  146.99,178.69 180 top
EEZ_SIGNATURE4  SIGNATURESMALL  [SIGNATURE_5MM]  22.99,178.69 180 top
EEZ_SIGNATURE5  SIGNATURESMALL  [SIGNATURE_5MM]  19.05,63.19 180 top
F1  LX008-V2 (80mA)  [POLYSWITCH-R7]  39.82,24.26 180 top
FB  60R@100MHz  [BEAD0603]  209.88,148.97 270 top
FB1  60R@100MHz  [BEAD0603]  85.88,148.97 270 top
IC1  TLC5925  [SOP63P600X175-24N]  167.05,41.21 180 top
IC2  SN74LVCC3245ADBRSSOP  [SOP65P780X200-24N]  218.86,53.85 0 top
IC3  SN74LVCC3245ADBRSSOP  [SOP65P780X200-24N]  192.51,59.94 180 top
IC4  SN74LVCC3245ADBRSSOP  [SOP65P780X200-24N]  192.76,69.85 270 top
IC5  SN74LVCC3245ADBRSSOP  [SOP65P780X200-24N]  209.02,38.93 90 top
IC6  LD1117ADT33TR  [DPACK]  243.76,10.92 180 top
IC7  SN74LVCC3245ADBRSSOP  [SOP65P780X200-24N]  190.03,39.5 180 top
IC8  SN74LVCC3245ADBRSSOP  [SOP65P780X200-24N]  217.97,69.28 90 top
IC9  Si8660EC-B-IS1  [SOIC-16]  186.86,88.58 90 top
IC10  SN74LV125APW  [SOP65P640X120-14N]  205.72,69.91 90 top
IC11  SI8620EC-B-IS  [SOIC127P600X173-8N]  196.64,88.58 270 top
IC12  SI8620EC-B-IS  [SOIC127P600X173-8N]  222.04,88.58 270 top
IC13  Si8660EC-B-IS1  [SOIC-16]  212.51,88.58 90 top
IC14  PCA21125  [SOP65P640X120-14N]  254.93,56.01 270 top
IC15  AT25256B  [SOIC127P600X175-8N]  218.8,43.81 0 top
IC16  ENC28J60-I/SS  [SOP65P780X200-28N]  241.41,63.63 270 top
IC17  BC857BS  [SOT65P210X110-6N]  158.35,72.64 0 top
IC18  NE555D  [SOIC127P600X175-8N]  162.28,77.98 180 top
IC19  BC857BS  [SOT65P210X110-6N]  155.24,17.65 270 top
IC20  NE555D  [SOIC127P600X175-8N]  159.3,12.7 90 top
IC21  DAC8552  [DGK8-M]  248.99,136.91 180 top
IC22  ADS1120  [PW(R-PDSO-G16)]  238.77,137.04 90 top
IC23  MCP23S08-E/SO  [SOIC127P1030X265-18N]  236.23,124.65 180 top
IC24  LP339D  [SO14]  223.97,141.86 90 top
IC25  OP27GSZ  [SOIC127P600X173-8N]  228.23,169.74 90 top
IC26  TL072D  [SOIC127P600X173-8N]  229.12,154.62 0 top
IC27  TL072D  [SOIC127P600X173-8N]  242.45,174.06 90 top
IC28  REF5025  [SOIC127P600X175-8N]  256.49,146.37 0 top
IC29  DAC8552  [DGK8-M]  124.99,136.91 180 top
IC30  ADS1120  [PW(R-PDSO-G16)]  114.77,137.04 90 top
IC31  MCP23S08-E/SO  [SOIC127P1030X265-18N]  112.23,124.65 180 top
IC32  LP339D  [SO14]  99.97,141.86 90 top
IC33  OP27GSZ  [SOIC127P600X173-8N]  104.23,169.74 90 top
IC34  TL072D  [SOIC127P600X173-8N]  105.12,154.62 0 top
IC35  TL072D  [SOIC127P600X173-8N]  118.45,174.06 90 top
IC36  REF5025  [SOIC127P600X175-8N]  132.49,146.37 0 top
IC37  LP2951SO8  [SOIC127P600X175-8N]  189.85,129.73 180 top
IC38  LM337LZ  [TO92]  180.13,120.4 180 top
IC39  Si8610BC-B-IS  [SOIC127P600X173-8N]  145.91,125.42 90 top
IC40  LP2951SO8  [SOIC127P600X175-8N]  189.85,139.38 180 top
IC41  TLC555  [SOIC127P600X175-8N]  189.41,117.73 90 top
IC42  LM5574  [SOP65P640X110-16N]  164.32,117.8 0 top
IC43  LP2951SO8  [SOIC127P600X175-8N]  65.85,129.73 180 top
IC44  LM337LZ  [TO92]  56.13,120.4 180 top
IC45  Si8610BC-B-IS  [SOIC127P600X173-8N]  21.91,125.42 90 top
IC46  LP2951SO8  [SOIC127P600X175-8N]  65.85,139.38 180 top
IC47  TLC555  [SOIC127P600X175-8N]  65.41,117.73 90 top
IC48  LM5574  [SOP65P640X110-16N]  40.32,117.8 0 top
IC49  LM25575  [SOP65P640X110-17N_HOLE]  28.2,86.68 90 top
J1  BS-244DSM-R  [BP_5_12/15WHITE]  144.96,77 0 top
J2  BS-244DSM-Y  [BP_5_12/15BLK]  125.91,77 0 top
J3  BS-244DSM-BL  [BP_5_12/15BLK]  106.86,77 0 top
J4  BS-244DSM-B  [BP_5_12/15WHITE]  87.81,77 0 top
J5  BS-244DSM-R  [BP_5_12/15WHITE]  144.96,24 0 top
J6  BS-244DSM-Y  [BP_5_12/15BLK]  125.96,24 0 top
J7  BS-244DSM-G  [BP_5_12/15BLK]  71.81,10 0 top
J8  BS-244DSM-BL  [BP_5_12/15BLK]  106.86,24 0 top
J9  BS-244DSM-B  [BP_5_12/15WHITE]  87.81,24 0 top
JP1  826926-2  [JP1]  187.81,25.02 270 top
JP2  826926-3  [JUMPER_3-PIN]  228.45,23.88 0 top
JP3  826926-2  [JP1]  256.65,43.43 0 top
JP4  0R-JUMPA  [A0R-JMP]  228.77,18.1 270 top
JP5  [JP4]  248.8,125.48 270 top
JP6  [JP4]  124.8,125.48 270 top
K_PAR  RT424005  [RT-C/016A5]  98.28,48.9 90 top
K_S1  G6K-2F-5DC  [G6K-2F]  116.95,90.17 270 top
K_S2  G6K-2F-5DC  [G6K-2F]  115.61,37.66 90 top
K_SER  RT424005  [RT-C/016A5]  128.57,53.53 180 top
KK1  SK 104 38 STS  [SK409]  53.28,41.34 270 top
L1  60R@100MHz  [BEAD0603]  230.61,96.65 90 top
L2  2u2  [L1210_COMBO]  177.09,134.24 180 top
L3  2u2  [L1210_COMBO]  179.88,139.83 90 top
L4  2u2  [L1210_COMBO]  155.56,117.92 0 top
L5  2u2  [L1210_COMBO]  53.09,134.24 180 top
L6  2u2  [L1210_COMBO]  55.88,139.83 90 top
L7  2u2  [L1210_COMBO]  31.56,117.92 0 top
L8  100uH (MSS1210-104K)  [MSS1278]  15.56,87.76 0 top
L9  2u2  [L1210]  28.26,77.53 90 top
LCD1  TFT_320QVT  [LCD_TFT_320QVT_MIRROR]  181.84,5.99 0 top
LED  HSMY-C170  [CHIPLED_0805]  185.47,124.78 180 top
LED1  HSMY-C170  [CHIPLED_0805]  61.47,124.78 180 top
LED_CC1  L-934ID  [LED3MM]  167.81,72 0 top
LED_CC2  L-934ID  [LED3MM]  167.81,19 0 top
LED_CV1  L-934YD  [LED3MM]  167.81,82 0 top
LED_CV2  L-934YD  [LED3MM]  167.81,29 0 top
LED_O1+  L-115WEGW-CA  [DUO_LED3MM]  144.96,91 270 top
LED_O1-  L-115WEGW-CA  [DUO_LED3MM]  87.81,91 270 top
LED_O2+  L-934GD  [LED3MM]  144.96,38 0 top
LED_O2-  L-934GD  [LED3MM]  87.81,38 0 top
LED_PWR  L-934MBC  [LED3MM]  167.81,101 270 top
LED_S1+  L-934YD  [LED3MM]  125.91,91 0 top
LED_S1-  L-934YD  [LED3MM]  106.86,91 0 top
LED_S2+  L-934YD  [LED3MM]  125.91,38 0 top
LED_S2-  L-934YD  [LED3MM]  106.86,38 0 top
MCU  [ARDUINO+ICSP_MIRROR]  272.9,80.2 180 top
OK1  MOC3052  [DIL6-SMD]  54.74,74.42 180 top
OK2  MOC3062  [DIL6-SMD]  44.83,74.55 180 top
P1  500K  [R_TRIM+R0805]  194.04,177.93 180 top
P2  500K  [R_TRIM+R0805]  70.04,177.93 180 top
Q1  IRLML2246TRPBF  [SOT95P237X112-3N]  131.68,100.9 180 top
Q2  IRLML2246TRPBF  [SOT95P237X112-3N]  150.28,34.16 270 top
Q3  IRLML2246TRPBF  [SOT95P237X112-3N]  147.3,51.82 180 top
Q4  2N7002  [SOT103P240X110-3N]  150.28,42.04 270 top
Q5  IRLML2246TRPBF  [SOT95P237X112-3N]  139.93,36.7 270 top
Q6  2N7002  [SOT103P240X110-3N]  250.36,33.46 0 top
Q7  2N7002  [SOT103P240X110-3N]  250.36,37.85 0 top
Q8  2N7002  [SOT103P240X110-3N]  247.63,73.98 0 top
Q9  IRLML2246TRPBF  [SOT95P237X112-3N]  180.7,12.45 180 top
Q10  2N7002  [SOT103P240X110-3N]  174.99,85.22 180 top
Q11  2N7002  [SOT103P240X110-3N]  175.05,90.11 180 top
Q12  2N7002  [SOT103P240X110-3N]  176.57,16.7 180 top
Q13  2N7002  [SOT103P240X110-3N]  176.57,22.86 180 top
Q14  IRFP250N  [TO247BV]  217.81,206 0 top
Q15  BCP56-16.115  [SOT230P700X180-4N]  210.38,193.74 180 top
Q16  MMBT5551  [SOT23-BEC]  209.81,177.29 0 top
Q17  BC846C  [SOT23-BEC]  226.58,198.19 180 top
Q18  BCP56-16.115  [SOT230P700X180-4N]  249.88,191.39 0 top
Q19  MMBT5401  [SOT23-BEC]  218.58,186.12 270 top
Q20  MMBT5401  [SOT23-BEC]  218.58,181.74 270 top
Q21  MMBT5551  [SOT23-BEC]  233.94,189.11 270 top
Q22  BC857C  [SOT23-BEC]  236.29,197.55 90 top
Q23  2N7002  [SOT103P240X110-3N]  220.61,134.88 180 top
Q24  2N7002  [SOT103P240X110-3N]  226.07,134.88 180 top
Q25  2N7002  [SOT103P240X110-3N]  214.32,123.26 270 top
Q26  BSS84P  [SOT95P237X112-3N]  214.32,118.94 90 top
Q27  IRF9640  [TO220B-VMOS]  238.81,206 0 top
Q28  IRFP250N  [TO247BV]  93.81,206 0 top
Q29  BCP56-16.115  [SOT230P700X180-4N]  86.38,193.74 180 top
Q30  MMBT5551  [SOT23-BEC]  85.81,177.29 0 top
Q31  BC846C  [SOT23-BEC]  102.58,198.19 180 top
Q32  BCP56-16.115  [SOT230P700X180-4N]  125.88,191.39 0 top
Q33  MMBT5401  [SOT23-BEC]  94.58,186.12 270 top
Q34  MMBT5401  [SOT23-BEC]  94.58,181.74 270 top
Q35  MMBT5551  [SOT23-BEC]  109.94,189.11 270 top
Q36  BC857C  [SOT23-BEC]  112.29,197.55 90 top
Q37  2N7002  [SOT103P240X110-3N]  96.61,134.88 180 top
Q38  2N7002  [SOT103P240X110-3N]  102.07,134.88 180 top
Q39  2N7002  [SOT103P240X110-3N]  90.32,123.26 270 top
Q40  BSS84P  [SOT95P237X112-3N]  90.32,118.94 90 top
Q41  IRF9640  [TO220B-VMOS]  114.81,206 0 top
Q42  MMBT5401  [SOT23-BEC]  186.87,181.93 90 top
Q43  BCP56-16.115  [SOT230P700X180-4N]  193.22,189.23 0 top
Q44  MCR08MT1G  [SOT230P700X180-4N]  173.4,192.28 0 top
Q45  IRF5210PBF  [TO220B-VMOS]  190.81,206 0 top
Q46  IRF5210PBF  [TO220B-VMOS]  178.81,206 0 top
Q47  MMBT5401  [SOT23-BEC]  62.87,181.93 90 top
Q48  BCP56-16.115  [SOT230P700X180-4N]  69.22,189.23 0 top
Q49  MCR08MT1G  [SOT230P700X180-4N]  49.4,192.28 0 top
Q50  IRF5210PBF  [TO220B-VMOS]  66.81,206 0 top
Q51  IRF5210PBF  [TO220B-VMOS]  54.81,206 0 top
Q52  BTA26-600  [TOP3S-1]  43.94,41.15 90 top
Q53  BTA26-600  [TOP3S-1]  53.28,41.34 90 top
R1  4K7  [R0805]  135.81,100.77 90 top
R2  4K7  [R0805]  150.86,51.82 90 top
R3  1R  [R0805]  137.58,61.47 0 top
R4  100K  [R0805]  150.35,37.4 180 top
R5  1K5  [R0805]  169.97,34.74 90 top
R6  100K  [R0805]  150.35,45.3 0 top
R7  4K7  [R0805]  139.87,39.88 180 top
R8  1R  [R0805]  89.64,52.01 90 top
R9  100K  [R0805]  246.93,33.46 270 top
R10  100K  [R0805]  246.93,37.91 270 top
R11  560R  [R0805]  258.81,49.53 90 top
R12  10K  [R0805]  255.38,48.26 180 top
R13  100K  [R0805]  244.33,73.91 90 top
R14  4K7  [R0805]  189.65,12.51 270 top
R15  10K  [R0805]  218.36,3.62 0 top
R16  50R 0.1%  [R0805]  240.83,91.19 90 top
R17  50R 0.1%  [R0805]  240.83,87.06 90 top
R18  50R 0.1%  [R0805]  240.83,96.71 270 top
R19  50R 0.1%  [R0805]  240.83,100.71 90 top
R20  10R  [R0805]  183.37,3.68 0 top
R21  2K2 1%  [R0805]  235.94,70.17 90 top
R22  100K  [R0805]  183.81,12.45 90 top
R23  120R 1%  [R0805]  235.94,74.1 90 top
R24  200R  [R0805]  250.49,81.92 180 top
R25  200R  [R0805]  255.31,81.92 0 top
R26  240R  [R0805]  171.56,83.76 90 top
R27  240R  [R0805]  171.56,88.96 270 top
R28  100K  [R0805]  178.22,84.96 90 top
R29  1K5  [R0805]  156.89,77.91 90 top
R30  100K  [R0805]  178.22,90.49 90 top
R31  240R  [R0805]  172.95,18.1 270 top
R32  240R  [R0805]  172.95,22.23 270 top
R33  100K  [R0805]  176.7,19.62 180 top
R34  100K  [R0805]  176.7,25.53 180 top
R35  1K5  [R0805]  159.3,18.35 0 top
R36  2K2  [R0805]  241.29,167.63 90 top
R37  2K  [R0805]  248.1,159.32 0 top
R38  2K  [R0805]  248.1,150.37 180 top
R39  2K2  [R0805]  234.58,172.16 270 top
R40  10K  [R0805]  234.9,150.31 90 top
R41  10K  [R0805]  234.9,159.44 90 top
R42  10K  [R0805]  243.98,161.86 180 top
R43  10K  [R0805]  243.98,155.02 180 top
R44  220R  [R0805]  238.96,150.37 180 top
R45  11K  [R0805]  238.64,171.58 270 top
R46  10K  [R0805]  246.71,171.96 90 top
R47  220R  [R0805]  239.4,161.86 180 top
R48  470R  [R0805]  237.25,189.17 90 top
R49  100R  [R0805]  220.61,189.11 0 top
R50  2K2  [R0805]  221.12,198.5 0 top
R51  470R  [R0805]  220.61,191.2 180 top
R52  16K  [R0805]  230.51,189.17 90 top
R53  5K1  [R0805]  225.75,129.48 180 top
R54  560R  [R0805]  228.29,189.17 270 top
R55  5K6  [R0805]  225.75,131.64 0 top
R56  2K2  [R0805]  216.23,141.35 90 top
R57  240R  [R0805]  213.12,134.75 180 top
R58  240R  [R0805]  213.12,132.59 0 top
R59  2R2/2W  [0411V]  247.4,200.92 270 top
R60  5K1  [R0805]  221.05,129.48 180 top
R61  12K  [R0805]  214.07,145.29 270 top
R62  5K6  [R0805]  221.05,131.64 0 top
R63  2K2  [R0805]  242.96,196.79 180 top
R64  10R  [R0805]  241.69,143.83 270 top
R65  2K2  [R0805]  242.96,199.33 180 top
R66  220R  [R0805]  243.79,189.17 270 top
R67  1K  [R0805]  241.69,189.17 270 top
R68  1R  [R0805]  250.77,185.99 0 top
R69  47K  [R0805]  214.07,141.35 270 top
R70  10K  [R0805]  222.51,150.62 0 top
R71  10K  [R0805]  234.58,167.01 270 top
R72  100K  [R0805]  214.26,126.37 0 top
R73  10K  [R0805]  239.53,189.17 270 top
R74  220R  [R0805]  214.83,182.06 90 top
R75  220R  [R0805]  214.83,186.12 90 top
R76  1K8  [R0805]  213.75,177.61 180 top
R77  51K  [R0805]  226.07,189.17 270 top
R78  100K  [R0805]  214.38,116.02 180 top
R79  240R  [R0805]  218.64,120.21 180 top
R80  240R  [R0805]  218.64,117.99 180 top
R81  1K  [R0805]  230.58,198.88 0 top
R82  7K5  [R0805]  238.96,157.16 0 top
R83  130K  [R0805]  243.98,157.16 0 top
R84  130K  [R0805]  238.96,152.53 0 top
R85  20K  [R0805]  248.1,157.16 0 top
R86  20K  [R0805]  248.1,152.53 0 top
R87  7K5  [R0805]  234.9,155.51 270 top
R88  3K9  [R0805]  222.89,173.61 0 top
R89  51R  [R0805]  218.96,171.58 0 top
R90  51R  [R0805]  218.96,169.48 0 top
R91  3K9  [R0805]  231.97,172.15 90 top
R92  0R1/3W  [0411V]  228.74,203.08 180 top
R93  R020/2W  [R2512]  214,170.31 270 top
R94  51R  [R0805]  222.89,171.58 0 top
R95  51R  [R0805]  222.89,169.48 0 top
R96  180R  [R0805]  231.97,168.21 90 top
R97  180R  [R0805]  222.89,175.64 180 top
R98  10K  [R0805]  216.23,145.29 90 top
R99  0R  [R0805]  222.7,156.53 0 top
R100  2K2  [R0805]  110.58,172.16 270 top
R101  2K2  [R0805]  117.29,167.63 90 top
R102  2K  [R0805]  124.1,159.32 0 top
R103  2K  [R0805]  124.1,150.37 180 top
R104  10K  [R0805]  110.9,150.31 90 top
R105  10K  [R0805]  110.9,159.44 90 top
R106  10R  [R0805]  117.69,143.83 270 top
R107  12K  [R0805]  90.07,145.29 270 top
R108  2K2  [R0805]  92.23,141.35 90 top
R109  5K6  [R0805]  101.75,131.64 0 top
R110  5K6  [R0805]  97.05,131.64 0 top
R111  5K1  [R0805]  101.75,129.48 180 top
R112  5K1  [R0805]  97.05,129.48 180 top
R113  240R  [R0805]  89.11,134.75 180 top
R114  10K  [R0805]  119.98,161.86 180 top
R115  10K  [R0805]  119.98,155.02 180 top
R116  11K  [R0805]  114.64,171.58 270 top
R117  240R  [R0805]  89.11,132.59 0 top
R118  10K  [R0805]  122.71,171.96 90 top
R119  220R  [R0805]  114.96,150.37 180 top
R120  220R  [R0805]  115.4,161.86 180 top
R121  470R  [R0805]  113.25,189.17 90 top
R122  100R  [R0805]  96.61,189.11 0 top
R123  2K2  [R0805]  97.12,198.5 0 top
R124  470R  [R0805]  96.61,191.2 180 top
R125  16K  [R0805]  106.51,189.17 90 top
R126  560R  [R0805]  104.29,189.17 270 top
R127  2R2/2W  [0411V]  123.41,200.92 270 top
R128  2K2  [R0805]  118.96,196.79 180 top
R129  2K2  [R0805]  118.96,199.33 180 top
R130  220R  [R0805]  119.79,189.17 270 top
R131  1K  [R0805]  117.69,189.17 270 top
R132  1R  [R0805]  126.77,185.99 0 top
R133  47K  [R0805]  90.07,141.35 270 top
R134  10K  [R0805]  98.51,150.62 0 top
R135  10K  [R0805]  110.58,167.01 270 top
R136  100K  [R0805]  90.26,126.37 0 top
R137  10K  [R0805]  115.53,189.17 270 top
R138  220R  [R0805]  90.83,182.06 90 top
R139  220R  [R0805]  90.83,186.12 90 top
R140  1K8  [R0805]  89.75,177.61 180 top
R141  51K  [R0805]  102.07,189.17 270 top
R142  100K  [R0805]  90.38,116.02 180 top
R143  240R  [R0805]  94.64,120.21 180 top
R144  240R  [R0805]  94.64,117.99 180 top
R145  1K  [R0805]  106.58,198.88 0 top
R146  7K5  [R0805]  114.96,157.16 0 top
R147  130K  [R0805]  119.98,157.16 0 top
R148  130K  [R0805]  114.96,152.53 0 top
R149  20K  [R0805]  124.1,157.16 0 top
R150  20K  [R0805]  124.1,152.53 0 top
R151  7K5  [R0805]  110.9,155.51 270 top
R152  3K9  [R0805]  98.89,173.61 0 top
R153  51R  [R0805]  94.96,171.58 0 top
R154  51R  [R0805]  94.96,169.48 0 top
R155  3K9  [R0805]  107.97,172.15 90 top
R156  0R1/3W  [0411V]  104.74,203.08 180 top
R157  R020/2W  [R2512]  90,170.31 270 top
R158  51R  [R0805]  98.89,171.58 0 top
R159  51R  [R0805]  98.89,169.48 0 top
R160  180R  [R0805]  107.97,168.21 90 top
R161  180R  [R0805]  98.89,175.64 180 top
R162  10K  [R0805]  92.23,145.29 90 top
R163  0R  [R0805]  98.7,156.53 0 top
R164  82K  [R0805]  187.06,177.87 270 top
R165  39K  [R0805]  190.23,182.56 90 top
R166  604R 1%  [R0805]  185.21,116.14 270 top
R167  12K 1%  [R0805]  194.17,125.86 180 top
R168  3K9 1%  [R0805]  190.49,125.86 180 top
R169  10K  [R0805]  186.93,143.7 180 top
R170  200R 1%  [R0805]  183.18,116.14 90 top
R171  4K7  [R0805]  182.61,189.11 90 top
R172  4K7  [R0805]  180.58,189.11 270 top
R173  3K3  [R0805]  165.91,193.3 0 top
R174  10K  [R0805]  165.85,191.07 180 top
R175  100R  [R0805]  187.31,185.68 270 top
R176  100R  [R0805]  187.31,193.68 270 top
R177  1K5  [R0805]  182.55,193.68 270 top
R178  100R  [R0805]  180.52,193.68 270 top
R179  18K  [R0805]  184.83,185.68 90 top
R180  18K  [R0805]  145.72,153.04 180 top
R181  560R  [R0805]  185.6,120.84 270 top
R182  12K 1%  [R0805]  190.29,135.51 180 top
R183  3K9 1%  [R0805]  190.29,133.54 0 top
R184  3K9  [R0805]  194.17,123.07 0 top
R185  30K  [R0805]  165.47,111.51 0 top
R186  20K  [R0805]  154.73,113.6 0 top
R187  30K 1%  [R0805]  160.58,111.51 180 top
R188  4K7 1%  [R0805]  160.58,113.6 0 top
R189  39K  [R0805]  154.29,121.61 270 top
R190  1K5  [R0805]  154.29,125.67 270 top
R191  10R  [R1210]  174.8,118.68 90 top
R192  82K  [R0805]  63.06,177.87 270 top
R193  39K  [R0805]  66.23,182.56 90 top
R194  604R 1%  [R0805]  61.21,116.14 270 top
R195  12K 1%  [R0805]  70.17,125.86 180 top
R196  3K9 1%  [R0805]  66.48,125.86 180 top
R197  10K  [R0805]  62.93,143.7 180 top
R198  200R 1%  [R0805]  59.18,116.14 90 top
R199  4K7  [R0805]  58.61,189.11 90 top
R200  4K7  [R0805]  56.58,189.11 270 top
R201  3K3  [R0805]  41.91,193.3 0 top
R202  10K  [R0805]  41.85,191.07 180 top
R203  100R  [R0805]  63.31,185.68 270 top
R204  100R  [R0805]  63.31,193.68 270 top
R205  1K5  [R0805]  58.55,193.68 270 top
R206  100R  [R0805]  56.52,193.68 270 top
R207  18K  [R0805]  60.83,185.68 90 top
R208  18K  [R0805]  21.72,153.04 180 top
R209  560R  [R0805]  61.6,120.84 270 top
R210  12K 1%  [R0805]  66.29,135.51 180 top
R211  3K9 1%  [R0805]  66.29,133.54 0 top
R212  3K9  [R0805]  70.17,123.07 0 top
R213  30K  [R0805]  41.47,111.51 0 top
R214  20K  [R0805]  30.73,113.6 0 top
R215  30K 1%  [R0805]  36.58,111.51 180 top
R216  4K7 1%  [R0805]  36.58,113.6 0 top
R217  39K  [R0805]  30.29,121.61 270 top
R218  1K5  [R0805]  30.29,125.67 270 top
R219  10R  [R1210]  50.8,118.68 90 top
R220  30K  [R0805]  34.29,87.5 90 top
R221  20K  [R0805]  32.32,76.9 90 top
R222  5K6 1%  [R0805]  34.29,82.87 270 top
R223  1K8 1%  [R0805]  32.32,82.87 90 top
R224  15K  [R0805]  24.2,77.47 0 top
R225  2K2  [R0805]  24.2,75.5 180 top
R226  10R  [R1206]  27.31,97.28 180 top
R227  330R/2W  [R2512]  44.58,64.64 180 top
R228  330R/2W  [R2512]  53.09,64.01 270 top
R229  270R  [R0805]  42.99,81.41 180 top
R230  270R  [R0805]  52.9,81.41 180 top
R231  150R/2W  [R2512]  41.85,47.24 270 top
R232  15R/7W  [R_0913]  53.53,16.07 270 top
SAR1  2057-09-BLF  [SAR]  77.25,97.54 0 top
SAR2  2057-09-BLF  [SAR]  85.26,12.76 270 top
SAR3  CG2-470L  [SAR]  4.6,22.86 270 top
SG1  LD-BZEN-0903  [BUZZER]  234.23,85.47 180 top
SH1  GND  [SHORT]  204.48,165.04 0 top
SH2  GND  [SHORT]  80.48,165.04 0 top
SH3  [SHORT_2]  168.32,165.1 0 top
SH4  [SHORT_2]  44.32,165.1 0 top
SW1  1301.9316  [TACTM-6XN]  247.81,22 90 bottom
TP1  [PCB_SHIELD_TAB]  252.01,47.75 0 top
TR1  MSD1260-824  [MSD1260]  165.4,130.69 270 top
TR2  MSD1260-824  [MSD1260]  41.4,130.69 270 top
TR3  12V/6VA  [PCB_TRAFO6VA_DUAL]  19.5,49.15 0 top
U$2  [RECYCLE_BIN1/8]  65.13,77.34 0 top
U$3  [PB_SMALL]  67.55,86.49 0 top
U$4  [ESD_SYMBOL]  64.08,89.45 0 top
VAR1  S20K275  [VARISTOR]  13.28,22.21 0 top
VAR2  S20K275  [VARISTOR]  23.3,13.97 180 top
VR1  ERZE08A201  [S10K175]  139.68,91.94 180 top
VR2  ERZE08A201  [S10K175]  133.33,91.96 180 top
VR3  ERZE08A201  [S10K175]  94.91,95.12 0 top
VR4  ERZE08A201  [S10K175]  100.75,95.12 0 top
VR5  ERZE08A201  [S10K175]  134.85,4.76 270 top
VR6  ERZE08A201  [S10K175]  134.79,12.13 90 top
VR7  ERZE08A201  [S10K175]  97.45,12.38 270 top
VR8  ERZE08A201  [S10K175]  97.45,5.65 270 top
X1  282836-4  [TBLOCK5.0_4S]  77,70.87 0 top
X2  282836-4  [TBLOCK5.0_4S]  77,46.48 0 top
X3  22-23-2021  [22-23-2021]  257.6,10.86 90 top
X4  22-23-2041  [22-23-2041]  257.6,20.7 90 top
X5  09185106324  [IDC-10PIN]  190.99,99.57 0 top
X6  09185106324  [IDC-10PIN]  216.39,99.57 0 top
X7  22-23-2021  [22-23-2021]  184.13,19.18 0 top
X8  LMJTAB881243M-L  [RJ45-TRAFO-LED]  253.66,92.58 90 top
X9  22-23-2031  [22-23-2031]  166.16,89.22 270 top
X10  22-23-2021  [22-23-2021]  150.81,63 180 top
X11  22-23-2031  [22-23-2031]  166.16,10.16 270 top
X12  22-23-2021  [22-23-2021]  150.81,10 180 top
X13  09185106324  [PAK100/2500-10]  241.44,112.21 0 top
X14  282836-4  [TBLOCK5.0_4]  256.87,174.31 0 top
X15  TSW-104-08-L-D  [TSW-104-02-S-D]  256.87,129.16 270 top
X16  22-23-2041  [22-23-2041]  215.34,111.25 0 top
X17  22-23-2031  [22-23-2031]  224.23,111.25 0 top
X18  22-23-2031  [22-23-2031]  206.07,138.12 270 top
X19  22-23-2031  [22-23-2031]  257.56,118.94 90 top
X20  TSW-109-08-L-D-RA  [TSW-109-08-L-D-RA]  202.95,159.96 270 top
X21  09185106324  [PAK100/2500-10]  117.44,112.21 0 top
X22  282836-4  [TBLOCK5.0_4]  132.87,174.31 0 top
X23  TSW-104-08-L-D  [TSW-104-02-S-D]  132.87,129.16 270 top
X24  22-23-2041  [22-23-2041]  91.34,111.25 0 top
X25  22-23-2031  [22-23-2031]  100.23,111.25 0 top
X26  22-23-2031  [22-23-2031]  82.07,138.12 270 top
X27  22-23-2031  [22-23-2031]  133.56,118.94 90 top
X28  TSW-109-08-L-D-RA  [TSW-109-08-L-D-RA]  78.95,159.96 270 top
X29  AC In  [TBLOCK5.0_2]  144.81,184.99 180 top
X30  22-23-2031  [22-23-2031]  144.7,133.03 0 top
X31  22-23-2031  [22-23-2031]  144.7,118.18 0 top
X32  22-23-2021  [22-23-2021]  195.69,118.3 90 top
X33  SSW-109-02-T-D-RA  [SSW-109-02-T-D-RA]  187.69,170.12 270 top
X34  AC In  [TBLOCK5.0_2]  20.81,184.99 180 top
X35  22-23-2031  [22-23-2031]  20.7,133.03 0 top
X36  22-23-2031  [22-23-2031]  20.7,118.18 0 top
X37  22-23-2021  [22-23-2021]  71.69,118.3 90 top
X38  SSW-109-02-T-D-RA  [SSW-109-02-T-D-RA]  63.69,170.12 270 top
X39  22-23-2041  [22-23-2061]  5.02,79.76 270 top
X40  22-23-2031  [22-23-2031]  16.32,76.71 0 top
X41  AC_IN  [TBLOCK5.0_5]  18.68,5.03 90 top
Y1  32,768kHz  [R26_XTAL]  257.41,60.83 0 top
Y2  25MHz  [HC-49/4H]  242.49,55.5 180 top
ZD1  1.5KE68A  [DO201]  117.32,100.58 180 top
ZD2  1.5KE68A  [DO201]  75.29,84.46 90 top
ZD3  1.5KE68A  [DO201]  114.72,12.38 180 top
ZD4  1.5KE68A  [DO201]  114.72,5.52 180 top
ZD5  13V  [MINIMELF]  220.54,196.22 0 top
ZD6  6V2  [MINIMELF]  231.85,194.69 0 top
ZD7  P6SMB68A  [DO214AA]  256.68,179.71 180 top
ZD8  13V  [MINIMELF]  96.54,196.22 0 top
ZD9  6V2  [MINIMELF]  107.85,194.69 0 top
ZD10  P6SMB68A  [DO214AA]  132.68,179.71 180 top
ZD11  13V  [MINIMELF]  184.96,192.85 270 top
ZD12  5V6  [MINIMELF]  165.02,188.66 180 top
ZD13  13V  [MINIMELF]  60.96,192.85 270 top
ZD14  5V6  [MINIMELF]  41.02,188.66 180 top
ZD15  1.5KE400CA  [DO201-BIDIR]  39.02,19.23 0 top
ZD16  1.5KE400CA  [DO201-BIDIR]  39.02,13.5 0 top

## Library data of the parts
B1 B2 C37 C84 C121 C124 C125 C129 C135 C146-C148 C150 C151 C155 C161 C172-C175 D33 D36 D40 D43 D44 EEZ_SIGNATURE1-EEZ_SIGNATURE5 F1 FB FB1 IC21 IC22 IC25-IC30 IC33-IC37 IC39-IC41 IC43 IC45-IC47 IC49 KK1 L2-L9 MCU OK1 P1 P2 Q14 Q15 Q18 Q28 Q29 Q32 Q43 Q48 R232 SAR3 SH1-SH4 TR1-TR3 X14 X15 X22 X23 X29 X34 X41 ZD5-ZD16 = EEZ_Lib1
B3 = rectifier
C1-C3 C5-C8 C10-C18 C20-C23 C25-C36 C38-C83 C85-C120 C122 C123 C126-C128 C130-C134 C136-C145 C149 C152-C154 C156-C160 C162-C171 C176-C186 R1-R231 = rcl
C4 C9 C19 C24 D6 EEZ_SIGNATURE IC11 IC12 IC14 IC15 IC17-IC20 J1-J9 JP2 K_PAR K_SER L1 LCD1 LED_O1+ LED_O1- SAR1 SAR2 SG1 SW1 TP1 X1 X2 X8 Y1 Y2 ZD1-ZD4 = MyLib6
D1-D5 D7-D32 D34 D35 D37-D39 D41 D42 = diode
IC1 = MyLib6; MPN: TLC5925IDBQR; OC_FARNELL: 1694438; OC_NEWARK: 46P3784; PACKAGE: SOP-24; SUPPLIER: Texas Instruments
IC2-IC5 IC7 IC8 = MyLib6; FARNELL: 2342537
IC6 = v-reg
IC9 IC13 = MyLib6; FARNELL: 2423356
IC10 = MyLib6; FARNELL: 9592512; TME: SN74LV125APW
IC16 = MyLib6; MPN: ENC28J60-I/SS; OC_FARNELL: 1084620; OC_NEWARK: 31K1708; PACKAGE: SOP-28; SUPPLIER: Microchip
IC23 IC31 = EEZ_Lib1; DESCRIPTION: IC I/O EXPANDER; MPN: MCP23S08-E/SO; OC_FARNELL: 1332092; OC_NEWARK: 08J8733; PACKAGE: SOIC-18; SUPPLIER: Microchip
IC24 IC32 IC38 IC44 = linear
IC42 IC48 = EEZ_Lib1; MPN: LM5574MT; OC_FARNELL: 1325419; OC_NEWARK: 32M1267; PACKAGE: TSSOP-16; SUPPLIER: National Semiconductors
JP1 JP3 JP5 JP6 = jumper
JP4 = jump-0r-smd
K_S1 K_S2 = relay; MF: OMRON COMPONENTS USA; MPN: G6K-2F DC24; OC_FARNELL: 1690427; OC_NEWARK: 36K7467
LED LED1 LED_CC1 LED_CC2 LED_CV1 LED_CV2 LED_O2+ LED_O2- LED_PWR LED_S1+ LED_S1- LED_S2+ LED_S2- = led
OK2 = optocoupler; MF: FAIRCHILD SEMICONDUCTOR; MPN: MOC3033S-M; OC_FARNELL: unknown; OC_NEWARK: 05C2878
Q1-Q3 Q5 Q9 = MyLib6; MPN: IRLML2246TRPBF; OC_FARNELL: 1888166; OC_NEWARK: 40T7450; PACKAGE: SOT-3; SUPPLIER: International Rectifier; TME: IRLML2246TRPBF
Q4 Q6-Q8 Q10-Q13 = MyLib6; MPN: 2N7002-7-F; OC_FARNELL: 1713823; OC_NEWARK: 25R5679; PACKAGE: SOT-23-3; SUPPLIER: DIODES INC.
Q16 Q17 Q19-Q22 Q30 Q31 Q33-Q36 Q42 Q47 = transistor
Q23-Q25 Q37-Q39 = EEZ_Lib1; MPN: 2N7002-7-F; OC_FARNELL: 1713823; OC_NEWARK: 25R5679; PACKAGE: SOT-23-3; SUPPLIER: DIODES INC.
Q26 Q40 = EEZ_Lib1; MPN: IRLML2246TRPBF; OC_FARNELL: 1888166; OC_NEWARK: 40T7450; PACKAGE: SOT-3; SUPPLIER: International Rectifier; TME: IRLML2246TRPBF
Q27 Q41 Q45 Q46 Q50 Q51 = EEZ_Lib1; FARNELL: 8648654; TME: IRF9640PBF
Q44 Q49 = EEZ_Lib1; FARNELL: 1459080; TME: MCR08MT1G
Q52 Q53 = triac
U$2-U$4 = olimex_logo1
VAR1 VAR2 = MyLib
VR1-VR8 = varistor
X3 X7 X10 X12 X32 X37 = con-molex; MF: MOLEX; MPN: 22-23-2021; OC_FARNELL: 1462926; OC_NEWARK: 25C3832
X4 X16 X24 = con-molex; MF: MOLEX; MPN: 22-23-2041; OC_FARNELL: 1462920; OC_NEWARK: 38C0355
X5 X6 = MyLib6; TME: 09185106324
X9 X11 X17-X19 X25-X27 X30 X31 X35 X36 X40 = con-molex; MF: MOLEX; MPN: 22-23-2031; OC_FARNELL: 1462950; OC_NEWARK: 30C0862
X13 X21 = con-3m; MF: 3M; MPN: 2510-6002UB; OC_FARNELL: 9838244; OC_NEWARK: 46F4725
X20 X28 = EEZ_Lib1; FARNELL: 2032801
X33 X38 = EEZ_Lib1; FARNELL: 1804359
X39 = con-molex; MF: MOLEX; MPN: 22-23-2061; OC_FARNELL: 1462922; OC_NEWARK: 27C1933